# Altium PCB lab2_kozlov_buck_boost.PcbDoc
Units mm, origin at the board's own origin, x right, y up, seen from the top; angles counter-clockwise.
Board outline 39 x 26.02 mm, 2 copper layers (Top Layer, Bottom Layer), stack 1.536 mm thick; 17 components, 14 nets, 60 pads, 130 vias.
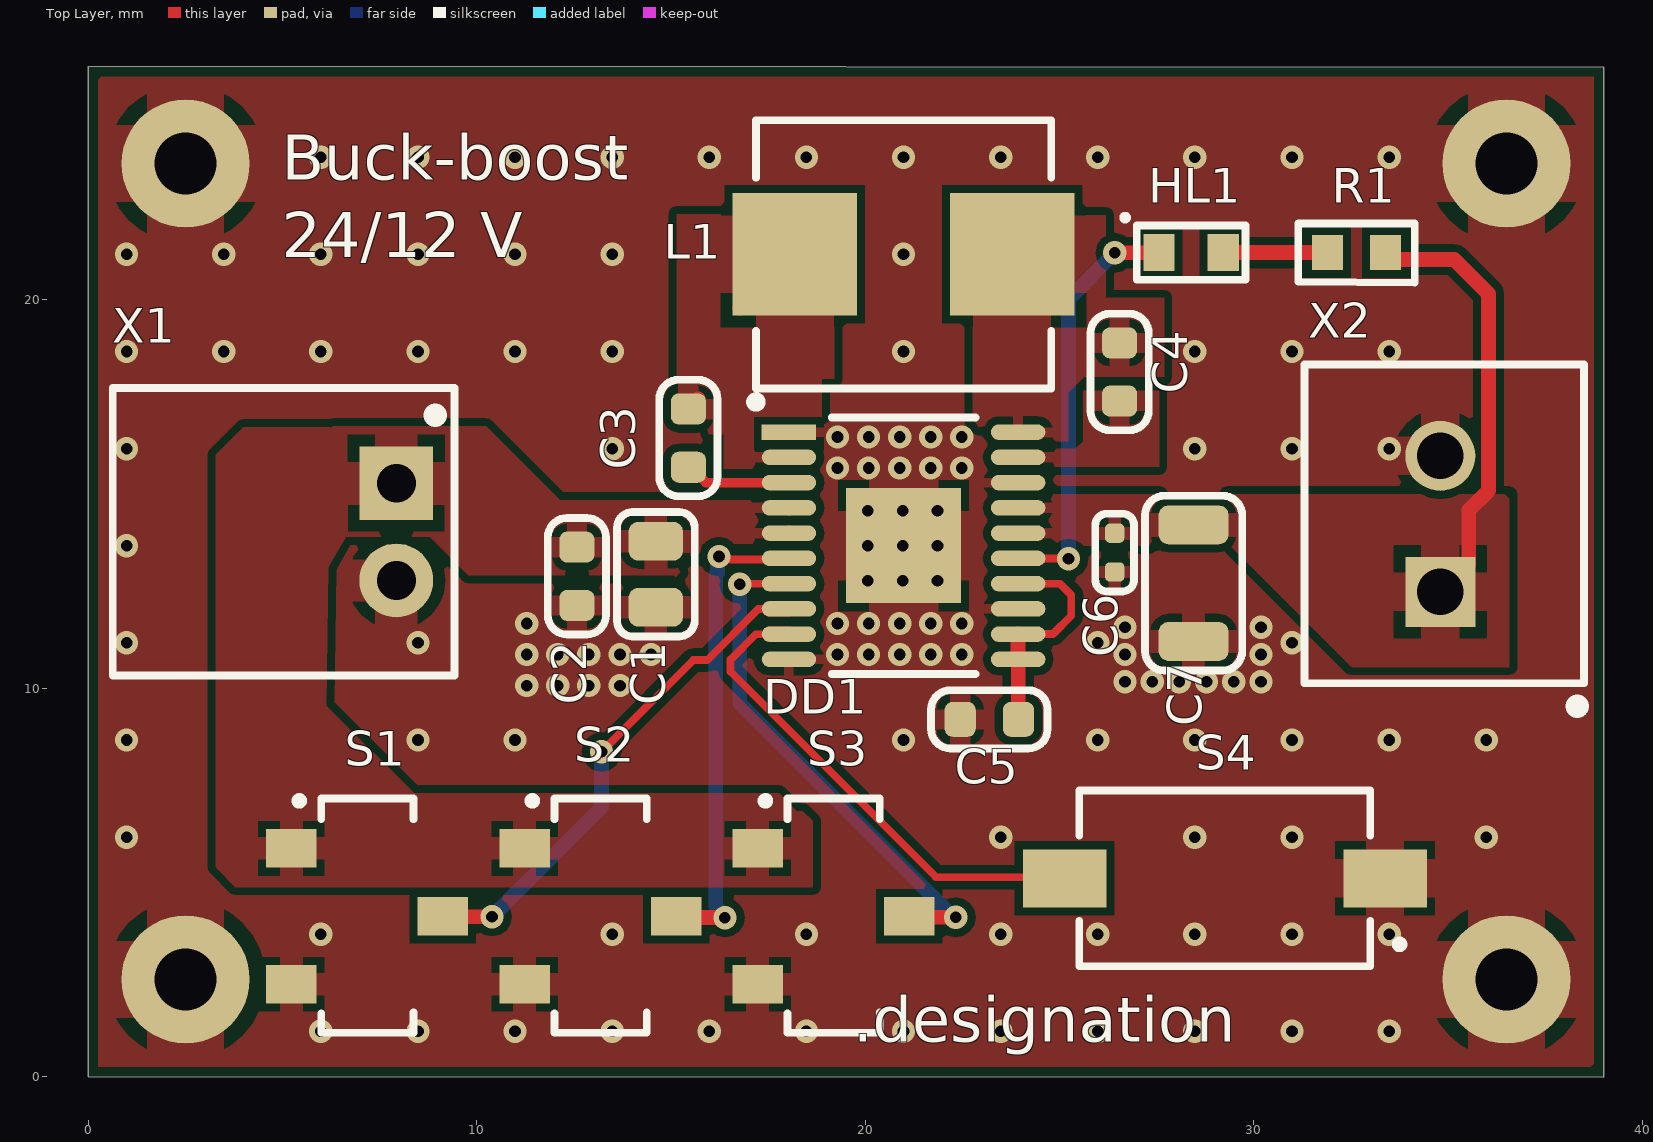
[diagram p0: Top Layer view]
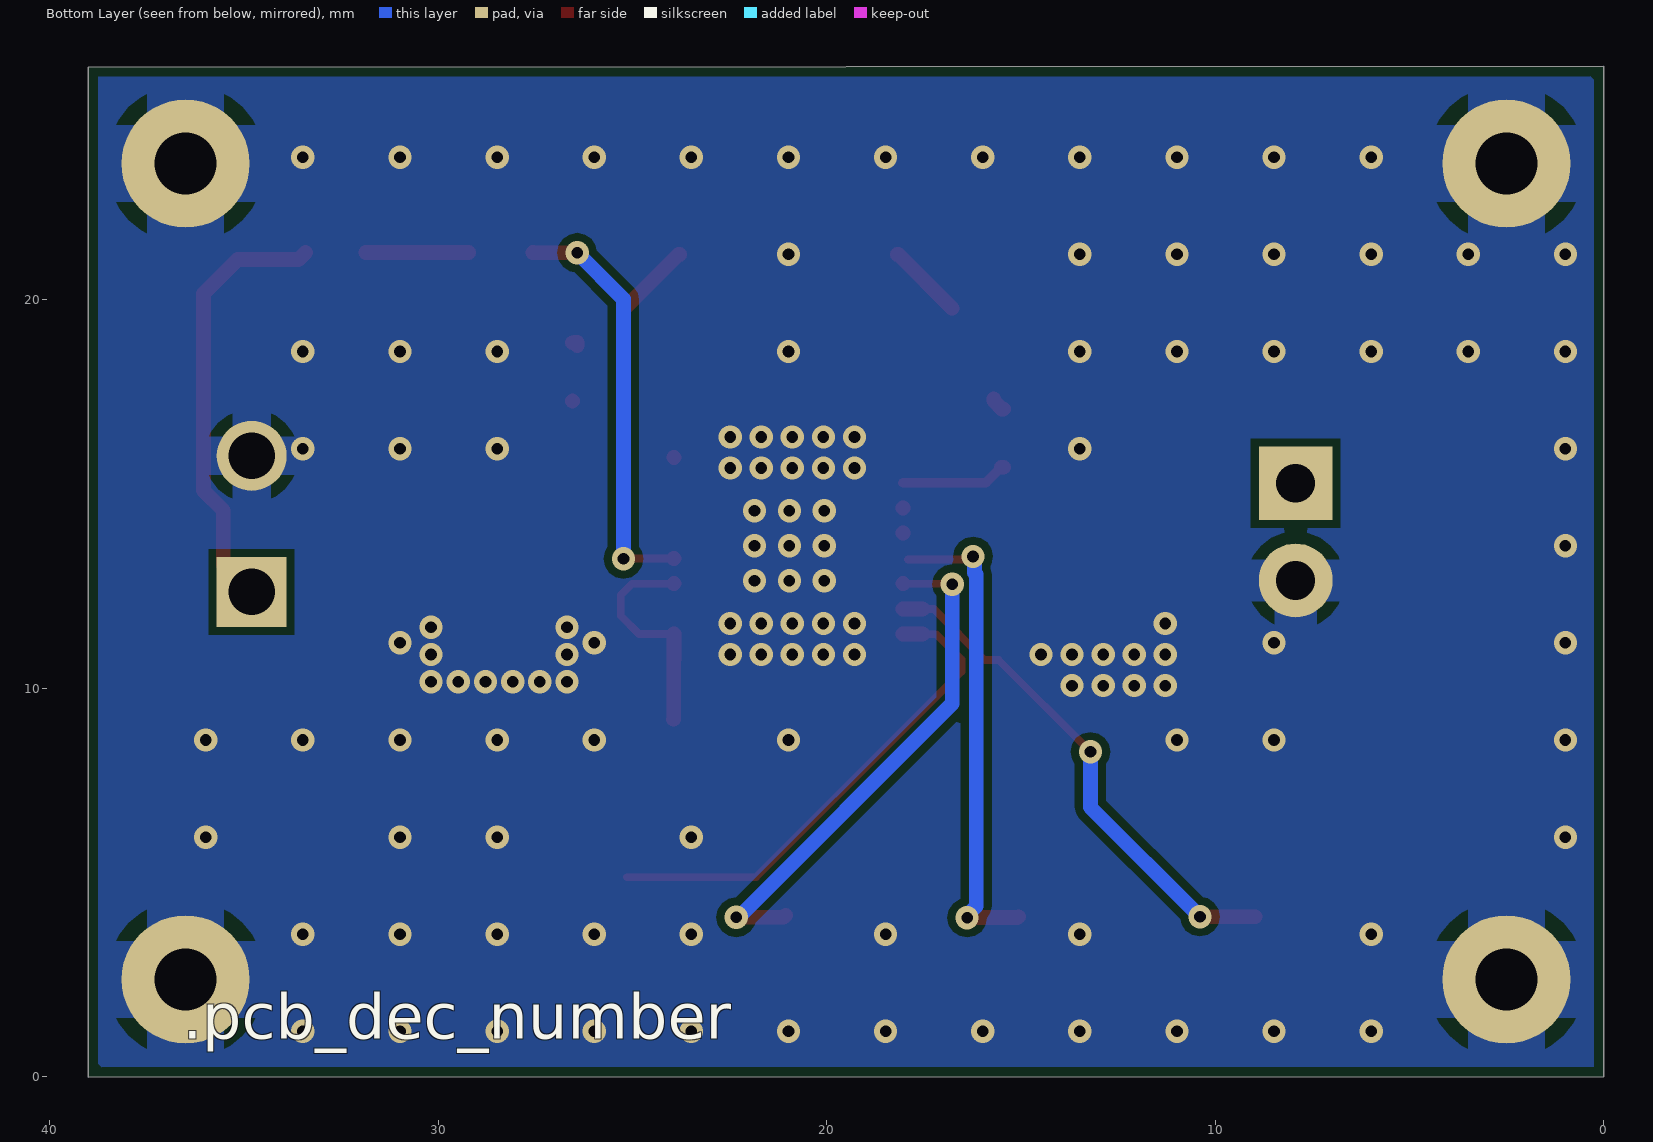
[diagram p1: Bottom Layer view, seen from below]
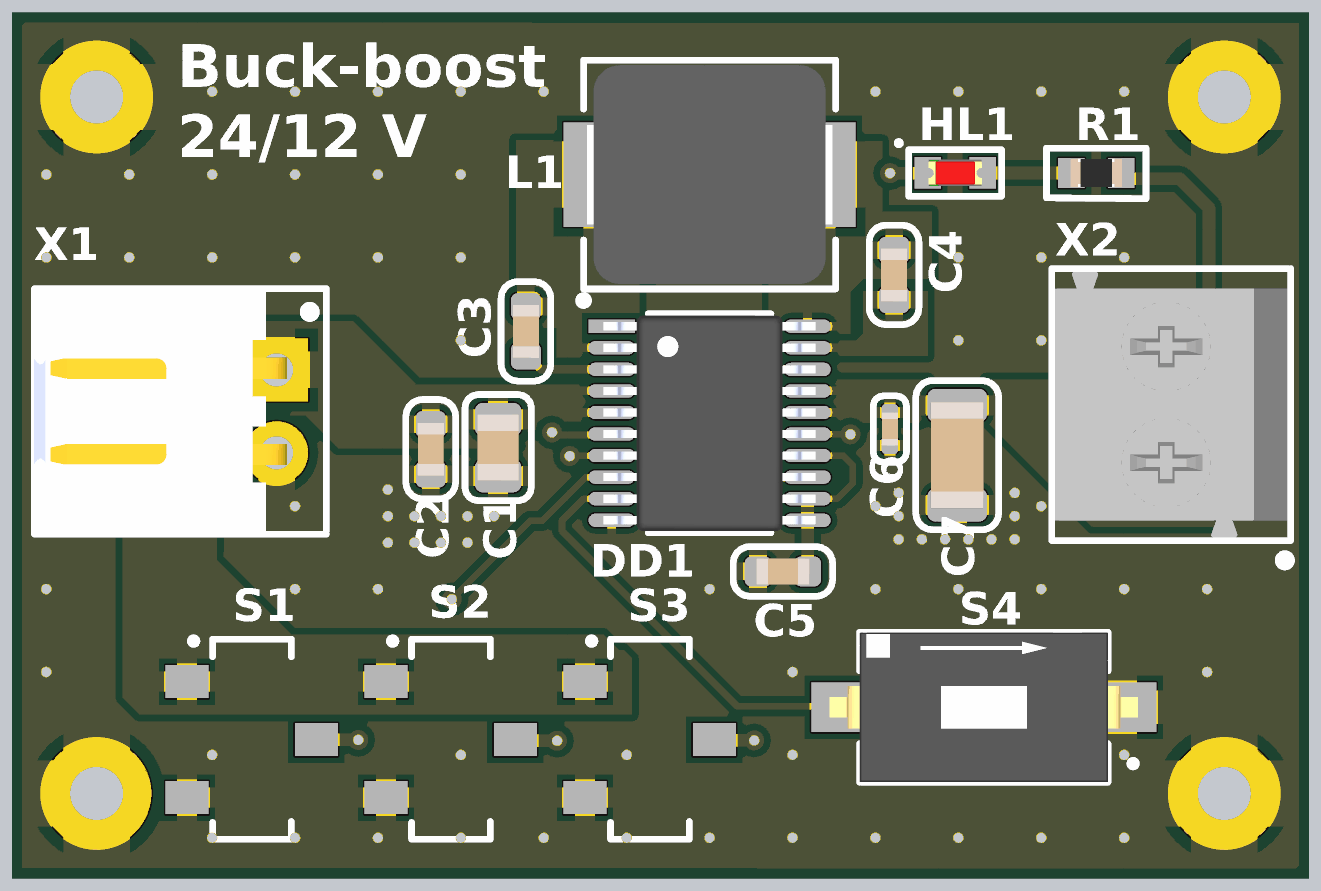
[diagram p2: 3D render of the assembled board from above, using the file's embedded part models]

## Layer stack, top to bottom
Top Solder: solder mask 0.0102, Solder Resist, Dk 3.5
Top Layer: signal copper 0.018
Core 1: core 1.5, FR4, Dk 4.6
Bottom Layer: signal copper 0.018
Bottom Solder: solder mask 0.0102, Solder Resist, Dk 3.5

## Board outline
0,0 39,-0.016 39,25.984 0,26

## Design rules (kind name [scope] priority, off if disabled: settings)
AcuteAngle min_acute_angle [OnCopper] p1: minimum=3.50000000000000E+0001 checktracksonly=FALSE // Минимальный угол между примитивами топологии
BoardOutlineClearance board_outline_clearance_std [NOT (OnLayer('Bottom Overlay') OR OnLayer('Top Overlay'))] p1: gap=0.25 ignorepadtopadclearanceinfootprint=FALSE except(0: Arc-SplitContinuation Track-SplitContinuation SMDPad-SplitContinuation THPad-SplitContinuation Via-SplitContinuation Fill-SplitContinuation Poly-SplitContinuation Region-SplitContinuation Text-SplitContinuation) // Отступ элементов топологии от края фрезеруемой печатной платы
Clearance clearance_outer_18um_std [OnTopLayer OR OnBottomLayer] p1: gap=0.125 ignorepadtopadclearanceinfootprint=TRUE except(0.2: Arc-Fill Arc-Poly Track-Fill Track-Poly SMDPad-SMDPad SMDPad-Fill SMDPad-Poly THPad-Fill THPad-Poly Via-Fill Via-Poly Fill-Fill Fill-Poly Poly-Poly Poly-Region Poly-Text; 0.25: Arc-Hole Track-Hole SMDPad-Hole THPad-Hole Via-Hole Fill-Hole Poly-Hole Region-Hole Text-Hole) // Зазоры на внешних слоях
Clearance clearance_inner_18um_std [NOT (OnTopLayer Or OnBottomLayer)] p2: gap=0.125 ignorepadtopadclearanceinfootprint=FALSE except(0.2: Arc-Fill Arc-Poly Track-Fill Track-Poly SMDPad-SMDPad SMDPad-Fill SMDPad-Poly THPad-Fill THPad-Poly Via-Fill Via-Poly Fill-Fill Fill-Poly Poly-Poly Poly-Region Poly-Text; 0.25: Arc-Hole Track-Hole SMDPad-Hole THPad-Hole Via-Hole Fill-Hole Poly-Hole Region-Hole Text-Hole) // Зазоры на внутренних слоях
ComponentClearance [All] p1: gap=0 collisioncheckmode=3 verticalgap=0 showdistances=FALSE
DiffPairsRouting diff_pairs_routing [All] p1: maxlimit=0.127 minlimit=0.127 mostfreqgap=0.127 toplayer_minwidth=0.143 toplayer_maxwidth=0.143 toplayer_prefwidth=0.143 bottomlayer_minwidth=0.143 bottomlayer_maxwidth=0.143 bottomlayer_prefwidth=0.143 impedanceprofiledriven=TRUE impedanceprofileid={FD46899E-B5A2-4EF5-A302-5D2DB6A51F35} maxuncoupledlength=12.7 // Правила трассировки дифференциальных пар
HoleSize min_hole_size_std [IsPad] p1: absolutevalues=TRUE maxlimit=5.9 minlimit=0.6 maxpercent=80.000 minpercent=20.000 // Диаметр межслойного переходного отверстия
HoleSize min_hole_size_via_std [IsVia] p2: absolutevalues=TRUE maxlimit=5.9 minlimit=0.3 maxpercent=80.000 minpercent=20.000 // Минимальный диаметр монтажного отверстия
HoleToHoleClearance hole_to_hole_clearance_std [All] p1: gap=0.2 allowstackedmicrovias=FALSE // Минимальное расстояние между краями двух отверстий
MinimumAnnularRing min_via_ar_std [All] p1: minimumring=0.15 // Поясок площадки переходного отверстия (Annular ring VIA)
MinimumAnnularRing min_pad_ar_std [All] p2: minimumring=0.2 // Поясок монтажной контактной площадки (Annular ring PAD)
MinimumSolderMaskSliver min_solder_mask_bridge_std [All] p1: minsoldermaskwidth=0.15 // Мнимальная ширина масочного мостика
PlaneClearance plane_clearance_18um_std [All] p1: clearance=0.2 // Отступ полигона (для слоя plane) от элементов топологии
PlaneConnect [All] p1: planeconnectstyle=Relief reliefexpansion=0.5 reliefentries=4 reliefconductorwidth=0.2 reliefairgap=0.2
PolygonConnect poly_connect_to_pad<=0.3 [(AsMM(PadXSize_AllLayers)<=0.301) or (AsMM(PadYSize_AllLayers)<=0.301)] p1: thpad.connectstyle=Relief thpad.reliefconductorwidth=0.2 thpad.reliefentries=4 thpad.polygonreliefangle="90 Angle" thpad.airgapwidth=0.2 smdpad.connectstyle=Relief smdpad.reliefconductorwidth=0.2 smdpad.reliefentries=4 smdpad.polygonreliefangle="90 Angle" smdpad.airgapwidth=0.2 via.connectstyle=Direct via.reliefconductorwidth=0.254 via.reliefentries=4 via.polygonreliefangle="90 Angle" via.airgapwidth=0.254 // Правила подключения полигонов для падов от 0,3мм и меньше
PolygonConnect poly_connect_to_pad<=0.4 [(AsMM(PadXSize_AllLayers)<=0.401) or (AsMM(PadYSize_AllLayers)<=0.401)] p2: thpad.connectstyle=Relief thpad.reliefconductorwidth=0.26 thpad.reliefentries=4 thpad.polygonreliefangle="90 Angle" thpad.airgapwidth=0.2 smdpad.connectstyle=Relief smdpad.reliefconductorwidth=0.26 smdpad.reliefentries=4 smdpad.polygonreliefangle="90 Angle" smdpad.airgapwidth=0.2 via.connectstyle=Direct via.reliefconductorwidth=0.254 via.reliefentries=4 via.polygonreliefangle="90 Angle" via.airgapwidth=0.254 // Правила подключения полигонов для падов от 0,4 и меньше
PolygonConnect poly_connect_to_pad<=0.6 [(AsMM(PadXSize_AllLayers)<=0.601) or (AsMM(PadYSize_AllLayers)<=0.601)] p3: thpad.connectstyle=Relief thpad.reliefconductorwidth=0.33 thpad.reliefentries=4 thpad.polygonreliefangle="90 Angle" thpad.airgapwidth=0.2 smdpad.connectstyle=Relief smdpad.reliefconductorwidth=0.33 smdpad.reliefentries=4 smdpad.polygonreliefangle="90 Angle" smdpad.airgapwidth=0.2 via.connectstyle=Direct via.reliefconductorwidth=0.254 via.reliefentries=4 via.polygonreliefangle="90 Angle" via.airgapwidth=0.254 // Правила подключения полигонов для падов от 0,6мм и меньше
PolygonConnect poly_connect_to_pad<=0.7 [(AsMM(PadXSize_AllLayers)<=0.701) or (AsMM(PadYSize_AllLayers)<=0.701)] p4: thpad.connectstyle=Relief thpad.reliefconductorwidth=0.46 thpad.reliefentries=4 thpad.polygonreliefangle="90 Angle" thpad.airgapwidth=0.2 smdpad.connectstyle=Relief smdpad.reliefconductorwidth=0.46 smdpad.reliefentries=4 smdpad.polygonreliefangle="90 Angle" smdpad.airgapwidth=0.2 via.connectstyle=Direct via.reliefconductorwidth=0.254 via.reliefentries=4 via.polygonreliefangle="90 Angle" via.airgapwidth=0.254 // Правила подключения полигонов для падов от 0,7мм и меньше
PolygonConnect poly_connect_to_pad<=0.8 [(AsMM(PadXSize_AllLayers)<=0.8)or(AsMM(PadYSize_AllLayers)<=0.8)] p5: thpad.connectstyle=Relief thpad.reliefconductorwidth=0.53 thpad.reliefentries=4 thpad.polygonreliefangle="90 Angle" thpad.airgapwidth=0.3 smdpad.connectstyle=Relief smdpad.reliefconductorwidth=0.53 smdpad.reliefentries=4 smdpad.polygonreliefangle="90 Angle" smdpad.airgapwidth=0.2 via.connectstyle=Direct via.reliefconductorwidth=0.254 via.reliefentries=4 via.polygonreliefangle="90 Angle" via.airgapwidth=0.254 // Правила подключения полигонов для падов от 0,8мм и меньше
PolygonConnect poly_connect_to_pad<=1 [(AsMM(PadXSize_AllLayers)<=1.01)or(AsMM(PadYSize_AllLayers)<=1.01)] p6: thpad.connectstyle=Relief thpad.reliefconductorwidth=0.6 thpad.reliefentries=4 thpad.polygonreliefangle="90 Angle" thpad.airgapwidth=0.3 smdpad.connectstyle=Relief smdpad.reliefconductorwidth=0.6 smdpad.reliefentries=4 smdpad.polygonreliefangle="90 Angle" smdpad.airgapwidth=0.2 via.connectstyle=Direct via.reliefconductorwidth=0.254 via.reliefentries=4 via.polygonreliefangle="90 Angle" via.airgapwidth=0.254 // Правила подключения полигонов для падов от 1мм и меньше
PolygonConnect poly_connect_to_pad<=1.3 [(AsMM(PadXSize_AllLayers)<=1.31)or(AsMM(PadYSize_AllLayers)<=1.31)] p7: thpad.connectstyle=Relief thpad.reliefconductorwidth=0.66 thpad.reliefentries=4 thpad.polygonreliefangle="90 Angle" thpad.airgapwidth=0.3 smdpad.connectstyle=Relief smdpad.reliefconductorwidth=0.86 smdpad.reliefentries=4 smdpad.polygonreliefangle="90 Angle" smdpad.airgapwidth=0.2 via.connectstyle=Direct via.reliefconductorwidth=0.254 via.reliefentries=4 via.polygonreliefangle="90 Angle" via.airgapwidth=0.254 // Правила подключения полигонов для падов от 1,3мм и меньше
PolygonConnect poly_connect_to_pad<=1.6 [(AsMM(PadXSize_AllLayers)<=1.61)or(AsMM(PadYSize_AllLayers)<=1.61)] p8: thpad.connectstyle=Relief thpad.reliefconductorwidth=0.8 thpad.reliefentries=4 thpad.polygonreliefangle="90 Angle" thpad.airgapwidth=0.3 smdpad.connectstyle=Relief smdpad.reliefconductorwidth=1 smdpad.reliefentries=4 smdpad.polygonreliefangle="90 Angle" smdpad.airgapwidth=0.2 via.connectstyle=Direct via.reliefconductorwidth=0.254 via.reliefentries=4 via.polygonreliefangle="90 Angle" via.airgapwidth=0.254 // Правила подключения полигонов для падов от 1,6мм и меньше
PolygonConnect poly_connect_to_pad<=1.8 [(AsMM(PadXSize_AllLayers)<=1.8)or(AsMM(PadYSize_AllLayers)<=1.8)] p9: thpad.connectstyle=Relief thpad.reliefconductorwidth=1 thpad.reliefentries=4 thpad.polygonreliefangle="90 Angle" thpad.airgapwidth=0.3 smdpad.connectstyle=Relief smdpad.reliefconductorwidth=1.2 smdpad.reliefentries=4 smdpad.polygonreliefangle="90 Angle" smdpad.airgapwidth=0.2 via.connectstyle=Direct via.reliefconductorwidth=0.254 via.reliefentries=4 via.polygonreliefangle="90 Angle" via.airgapwidth=0.254 // Правила подключения полигонов для падов от 1,8мм и меньше
PolygonConnect poly_connect_to_pad<=2 [(AsMM(PadXSize_AllLayers)<=2.01)or(AsMM(PadYSize_AllLayers)<=2.01)] p10: thpad.connectstyle=Relief thpad.reliefconductorwidth=1.1 thpad.reliefentries=4 thpad.polygonreliefangle="90 Angle" thpad.airgapwidth=0.3 smdpad.connectstyle=Relief smdpad.reliefconductorwidth=1.4 smdpad.reliefentries=4 smdpad.polygonreliefangle="90 Angle" smdpad.airgapwidth=0.2 via.connectstyle=Direct via.reliefconductorwidth=0.254 via.reliefentries=4 via.polygonreliefangle="90 Angle" via.airgapwidth=0.254 // Правила подключения полигонов для падов от 2мм и меньше
PolygonConnect poly_connect_to_pad<=2.3 [(AsMM(PadXSize_AllLayers)<=2.31)or(AsMM(PadYSize_AllLayers)<=2.31)] p11: thpad.connectstyle=Relief thpad.reliefconductorwidth=1.2 thpad.reliefentries=4 thpad.polygonreliefangle="90 Angle" thpad.airgapwidth=0.3 smdpad.connectstyle=Relief smdpad.reliefconductorwidth=1.4 smdpad.reliefentries=4 smdpad.polygonreliefangle="90 Angle" smdpad.airgapwidth=0.2 via.connectstyle=Direct via.reliefconductorwidth=0.254 via.reliefentries=4 via.polygonreliefangle="90 Angle" via.airgapwidth=0.254 // Правила подключения полигонов для падов от 2,3мм и меньше
PolygonConnect poly_connect_to_pad<=2.5 [(AsMM(PadXSize_AllLayers)<=2.51)or(AsMM(PadYSize_AllLayers)<=2.51)] p12: thpad.connectstyle=Relief thpad.reliefconductorwidth=1.2 thpad.reliefentries=4 thpad.polygonreliefangle="90 Angle" thpad.airgapwidth=0.3 smdpad.connectstyle=Relief smdpad.reliefconductorwidth=1.4 smdpad.reliefentries=4 smdpad.polygonreliefangle="90 Angle" smdpad.airgapwidth=0.2 via.connectstyle=Direct via.reliefconductorwidth=0.254 via.reliefentries=4 via.polygonreliefangle="90 Angle" via.airgapwidth=0.254 // Правила подключения полигонов для падов от 2,5мм и меньше
PolygonConnect poly_connect_to_pad<=2.7 [(AsMM(PadXSize_AllLayers)<=2.71)or(AsMM(PadYSize_AllLayers)<=2.71)] p13: thpad.connectstyle=Relief thpad.reliefconductorwidth=1.4 thpad.reliefentries=4 thpad.polygonreliefangle="90 Angle" thpad.airgapwidth=0.3 smdpad.connectstyle=Relief smdpad.reliefconductorwidth=1.6 smdpad.reliefentries=4 smdpad.polygonreliefangle="90 Angle" smdpad.airgapwidth=0.2 via.connectstyle=Direct via.reliefconductorwidth=0.254 via.reliefentries=4 via.polygonreliefangle="90 Angle" via.airgapwidth=0.254 // Правила подключения полигонов для падов от 2,7мм и меньше
PolygonConnect poly_connect_to_pad<=3 [(AsMM(PadXSize_AllLayers)<=3.01)or(AsMM(PadYSize_AllLayers)<=3.01)] p14: thpad.connectstyle=Relief thpad.reliefconductorwidth=1.6 thpad.reliefentries=4 thpad.polygonreliefangle="90 Angle" thpad.airgapwidth=0.3 smdpad.connectstyle=Relief smdpad.reliefconductorwidth=1.8 smdpad.reliefentries=4 smdpad.polygonreliefangle="90 Angle" smdpad.airgapwidth=0.2 via.connectstyle=Direct via.reliefconductorwidth=0.254 via.reliefentries=4 via.polygonreliefangle="90 Angle" via.airgapwidth=0.254 // Правила подключения полигонов для падов от 3мм и меньше
PolygonConnect poly_connect_to_pad<=7 [(AsMM(PadXSize_AllLayers)<7.01)or(AsMM(PadYSize_AllLayers)<=7.01)] p15: thpad.connectstyle=Relief thpad.reliefconductorwidth=2 thpad.reliefentries=4 thpad.polygonreliefangle="90 Angle" thpad.airgapwidth=0.4 smdpad.connectstyle=Relief smdpad.reliefconductorwidth=2 smdpad.reliefentries=4 smdpad.polygonreliefangle="90 Angle" smdpad.airgapwidth=0.3 via.connectstyle=Direct via.reliefconductorwidth=0.254 via.reliefentries=4 via.polygonreliefangle="90 Angle" via.airgapwidth=0.254 // Правила подключения полигонов для падов от 7мм и меньше
PolygonConnect poly_connect_to_pad [All] p16: thpad.connectstyle=Relief thpad.reliefconductorwidth=0.25 thpad.reliefentries=4 thpad.polygonreliefangle="90 Angle" thpad.airgapwidth=0.2 smdpad.connectstyle=Relief smdpad.reliefconductorwidth=0.25 smdpad.reliefentries=4 smdpad.polygonreliefangle="90 Angle" smdpad.airgapwidth=0.2 via.connectstyle=Direct via.reliefconductorwidth=0.25 via.reliefentries=4 via.polygonreliefangle="90 Angle" via.airgapwidth=0.2 // Правила подключения полигонов общие
RoutingCorners [All] p1 off: cornerstyle=45-Degree minsetback=2.5 maxsetback=2.5
RoutingVias [All] p1: holewidth=0.3 width=0.6 viastyle="Through Hole" minholewidth=0.3 minwidth=0.6 maxholewidth=5.9 maxwidth=6.4
SilkToSilkClearance silk_to_silk_clearance_std [All] p1 off: silktosilkclearance=0.15 // Отступ текста шелкографии от других примитивов шелкографии
SilkToSolderMaskClearance silk_to_solder_mask_clearance_std [IsPad] p1 off: minsilkscreentomaskgap=0.15 clearancetoexposedcopper=FALSE // Минимальное расстояние между элементами шелкографии и вскрытой медью
SolderMaskExpansion solder_mask_expansion_std [All] p1: expansion=0.05 // Припуск паяльной масски
UnRoutedNet [All] p1: checkbadconnections=TRUE
Width width_18um_std [All] p1: maxlimit=10 minlimit=0.125 preferedwidth=0.15 checkconnectedcopper=TRUE // Ширина проводников (общая)
19 further rules are at their usual default settings.

## Components (designator, comment, footprint, x,y, rotation, side; value= is the part's Value field where it differs from the comment)
C1 "10 мк" C0805 14.605,12.929 r270 top
C2 "0,47 мк" C0603 12.573,12.878 r270 top
C3 "0,1 мк" C0603 15.443,16.434 r270 top
C4 "0,1 мк" C0603 26.543,18.136 r270 top
C5 "4,7 мк" C0603 23.19,9.195 r180 top
C6 "0,1 мк" C0402 26.416,13.487 r270 top
C7 "22 мк" C1206 28.448,12.7 r270 top
DD1 "TPS55165QPWPRQ1" HTSSOP-20 20.981,13.663 r0 top
HL1 "TLMG1100-GS08" HL0603 28.385,21.209 r0 top
L1 "SRP7028A-4R7M" SRP-2-730X660X280 20.981,21.163 r0 top
R1 "100 к" R0603 32.639,21.209 r0 top
S1 "TDD01H0SB1R" TDD01H0SB1R 7.2,4.1 r0 top
S2 "TDD01H0SB1R" TDD01H0SB1R 13.2,4.1 r0 top
S3 "TDD01H0SB1R" TDD01H0SB1R 19.2,4.1 r0 top
S4 "SDA01H1SBD" SDA01H1SBD 29.25,5.1 r180 top
X1 "DS1029-2-MRW6XB" DS1029-2-MRW6XB 4.775,14.021 r270 top
X2 "1776275-2" 1776275-2 34.9,14.225 r90 top

## Footprints (in the part's own frame and the unit in brackets; to place one, negate y for a bottom-side part, rotate by r counter-clockwise, add the part's x,y. Pads: shape width x height; smd on the part's side, far side on the other; paste and mask are expansions set on the pad)
1776275-2 [mm] "PCB Terminal Blocks, Header, Wire-to-Board, 2 Position, 3.5mm [.138in] Centerline, 1 Row, Side Wire Entry Angle, 26 – 18AWG Wire Size"
  rect 1.8x1.8 hole 1.2: 1(-1.75,0.1)
  round 1.8 hole 1.2: 2(1.75,0.1)
  silkscreen extent -4.7,-3.6 4.1,3.6, body extent -4,-3.5 4,3.5, height 8.3
C0402 [mm] "Chip Capacitor, 2-Leads, Body 1,00x0,50mm, IPC Medium Density"
  rrect50% 0.5x0.5 smd: 1(-0.5,0) 2(0.5,0)
  silkscreen extent -1,-0.5 1,0.5, body extent -0.5,-0.25 0.5,0.25, height 0.5
C0603 [mm] "Chip Capacitor, 2-Leads, Body 1,60x0,80mm, IPC Medium Density"
  rrect50% 0.8x0.9 smd: 1(-0.75,0) 2(0.75,0)
  silkscreen extent -1.5,-0.75 1.5,0.75, body extent -0.8,-0.4 0.8,0.4, height 0.8
C0805 [mm] "Chip Capasitor, 2-Leads, Body 2,00x1,25mm, IPC Medium Density"
  rrect50% 1x1.4 smd: 1(-0.85,0) 2(0.85,0)
  silkscreen extent -1.6,-1 1.6,1, body extent -1,-0.62 1,0.63, height 0.6
C1206 [mm] "Chip Capacitor, 2-Leads, Body 3,20x1,60mm, IPC Medium Density"
  rrect50% 1x1.8 smd: 1(-1.5,0) 2(1.5,0)
  silkscreen extent -2.25,-1.25 2.25,1.25, body extent -1.6,-0.8 1.6,0.8, height 0.78
DS1029-2-MRW6XB [mm]
  rect 1.9x1.9 hole 1: 1(-1.25,3.15)
  round 1.9 hole 1: 2(1.25,3.15)
  silkscreen extent -3.7,-4.15 3.7,4.65, body extent -3.7,-4.17 3.7,3.47, height 5.75
HL0603 [mm] "Chip Diode, 2-Leads, Body 1,60x0,80mm, IPC Medium Density"
  rect 0.8x0.95 smd: 1(-0.825,0) 2(0.825,0)
  silkscreen extent -1.75,-0.7 1.4,0.95, body extent -0.81,-0.4 0.81,0.4, height 0.6
HTSSOP-20 [mm] "TSOP, 20-Leads, Body 6,50x4,40mm, Pitch 0,65mm, Thermal Pad 2,96x2,96mm, IPC Medium Density"
  rect 2.96x2.96 smd: 0(0,0)
  rect 1.4x0.4 smd: 1(-2.95,2.925)
  oval 1.4x0.4 smd: 2(-2.95,2.275) 3(-2.95,1.625) 4(-2.95,0.975) 5(-2.95,0.325) 6(-2.95,-0.325) 7(-2.95,-0.975) 8(-2.95,-1.625) 9(-2.95,-2.275) 10(-2.95,-2.925) 11(2.95,-2.925) 12(2.95,-2.275) 13(2.95,-1.625) 14(2.95,-0.975) 15(2.95,-0.325) 16(2.95,0.325) 17(2.95,0.975) 18(2.95,1.625) 19(2.95,2.275) 20(2.95,2.925)
  silkscreen extent -3.92,-3.3 1.85,3.82, body extent -3.2,-3.25 3.2,3.25, height 1.1
R0603 [mm] "Chip Resistor, 2-Leads, Body 1,60x0,80mm, IPC Medium Density"
  rect 0.8x0.9 smd: 1(-0.75,0) 2(0.75,0)
  silkscreen extent -1.5,-0.77 1.5,0.75, body extent -0.77,-0.43 0.78,0.43, height 0.43
SDA01H1SBD [mm]
  rect 2.15x1.5 smd: 1(-4.125,0) 2(4.125,0)
  silkscreen extent -4.6,-2.26 3.74,2.26, body extent -4.65,-2.26 4.65,2.26, height 5.44
SRP-2-730X660X280 [mm] "Precision Wire Wound Inductor, 2-Leads, Body 7,30x6,60mm, IPC Medium Density"
  rect 3.2x3.15 smd: 1(-2.8,0) 2(2.8,0)
  silkscreen extent -3.8,-3.45 3.8,3.45, body extent -3.7,-3.3 3.7,3.3, height 3
TDD01H0SB1R [mm]
  rect 1.3x1 smd: 1(-1.975,1.774) 2(-1.975,-1.726) 3(1.925,0.024)
  silkscreen extent -1.87,-2.98 1.17,3.09, body extent -2.12,-2.98 2.08,3.02, height 2.29

## Part data
C1: library part c0091, "=Описание", HelpURL=https://www.yageo.com/upload/media/product/productsearch/datasheet/mlcc/UPY-GPHC_X5R_4V-to-50V_26.pdf, ID=c0091, Корпус=0805, Наименование=CC0805KRX5R9BB106, Напряжение="50 В", Номинал="10 мк", Номинальное напряжение="50 В", Описание="Конденсатор чип 0805 10 мкФ 50 В ±10 %", Отклонение="±10 %", Производитель="YAGEO Corp.", Рабочие температуры="от –55 °С до +85 °С", Температурный коэффициент емкости=X5R, Фамилия=Паньков
C2: library part c0052, "=Описание", HelpURL=https://www.yageo.com/upload/media/product/productsearch/datasheet/mlcc/UPY-GPHC_X5R_4V-to-50V_26.pdf, ID=c0052, Корпус=0603, Наименование=CC0603KRX5R9BB474, Напряжение="50 В", Номинал="0,47 мк", Номинальное напряжение="50 В", Описание="Конденсатор чип 0603 470 нФ 50 В ±10 %", Отклонение="±10 %", Производитель="YAGEO Corp.", Рабочие температуры="от –55 °С до +85 °С", Температурный коэффициент емкости=X5R, Фамилия=Паньков
C3 C4: library part c0034, "=Описание", HelpURL=https://www.yageo.com/upload/media/product/products/datasheet/mlcc/UPY-GPHC_X7R_6.3V-to-50V_20.pdf, ID=c0034, Корпус=0603, Наименование=CC0603JRX7R9BB104, Напряжение="50 В", Номинал="0,1 мк", Номинальное напряжение="50 В", Описание="Конденсатор чип 0603 100 нФ 50 В ±5 %", Отклонение="±5 %", Производитель="YAGEO Corp.", Рабочие температуры="от –55 °С до +125 °С", Температурный коэффициент емкости=X7R, Фамилия=Ларионов
C5: library part c0080, "=Описание", HelpURL=https://www.yageo.com/upload/media/product/productsearch/datasheet/mlcc/UPY-GPHC_X5R_4V-to-50V_26.pdf, ID=c0080, Корпус=0603, Наименование=CC0603KRX5R8BB475, Напряжение="25 В", Номинал="4,7 мк", Номинальное напряжение="25 В", Описание="Конденсатор чип 0603 4,7 мкФ 25 В ±10 %", Отклонение="±10 %", Производитель="YAGEO Corp.", Рабочие температуры="от –55 °С до +85 °С", Температурный коэффициент емкости=X5R, Фамилия=Ларионов
C6: library part c0029, "=Описание", HelpURL=https://www.yageo.com/upload/media/product/productsearch/datasheet/mlcc/UPY-GPHC_X5R_4V-to-50V_26.pdf, ID=c0029, Корпус=0402, Наименование=CC0402KRX5R8BB104, Напряжение="25 В", Номинал="0,1 мк", Номинальное напряжение="25 В", Описание="Конденсатор чип 0402 100 нФ 25 В ±10 %", Отклонение="±10 %", Производитель="YAGEO Corp.", Рабочие температуры="от –55 °С до +85 °С", Температурный коэффициент емкости=X5R, Фамилия=Паньков
C7: library part c0105, "=Описание", HelpURL=https://www.yageo.com/upload/media/product/productsearch/datasheet/mlcc/UPY-GPHC_X7R_6.3V-to-50V_20.pdf, ID=c0105, Корпус=1206, Наименование=CC1206KRX7R8BB226, Напряжение="25 В", Номинал="22 мк", Номинальное напряжение="25 В", Описание="Конденсатор чип 1206 22 мкФ 25 В ±10 %", Отклонение="±10 %", Производитель="YAGEO Corp.", Рабочие температуры="от –55 °С до +125 °С", Температурный коэффициент емкости=X7R, Фамилия=Паньков
DD1: library part dd0013, "=Описание", HelpURL=https://www.ti.com/product/TPS55165-Q1, ID=dd0013, Входное напряжение="от 2 В до 36 В", Выходное напряжение="5 В/12 В", Коммутируемый ток="до 1 А", Корпус=HTSSOP-20, Наименование=TPS55165QPWPRQ1, Описание="Повышающий/понижающий преобразователь напряжения 36 В и 1 А", Производитель="Texas Instruments", Рабочие температуры="от –40 °С до +125 °С", Фамилия=Козлов, Частота переключения="2 МГц"
HL1: library part hl0005, "=Описание", HelpURL=https://www.vishay.com/leds/list/product-83173/, ID=hl0005, Корпус=0603, Наименование=TLMG1100-GS08, Номинальная длина волны="570 нм", Номинальная сила света="35 мкд", Номинальное падение напряжения="2,1 В", Номинальный прямой ток="30 мА", Описание="Светодиод чип 0603 зеленый", Производитель="Vishay Intertechnology, Inc.", Рабочие температуры="от –40 °С до +100 °С", Рассеиваемая мощность="90 мВт", Фамилия=Ларионов, Цвет=Green
L1: library part l0004, "=Описание", HelpURL=https://www.bourns.com/products/magnetic-products/power-inductors-aec-q200-compliant/product/SRP7028A, ID=l0004, Индуктивность="4,7 мкГн", Корпус="7,3 x 6,6 x 2,8", Максимальное активное сопротивление="40 мОм", Наименование=SRP7028A-4R7M, Номинал="4,7 мкГн", Номинальное активное сопротивление="37 мОм", Номинальный ток (при нагреве на 20 °С/40 °С)="5,5 А", Описание="Катушка индуктивности 4,7 мкГн ±20 %", Отклонение="±20 %", Производитель="Bourns, Inc.", Рабочее напряжение="не указано", Рабочие температуры="от –55 °С до +150 °С", Резонансная частота="21 МГц", Ток насыщения="10 А", Фамилия=Игнатова
R1: library part r0094, "=Описание", HelpURL=https://www.yageo.com/upload/media/product/productsearch/datasheet/rchip/PYu-RC_Group_51_RoHS_L_11.pdf, ID=r0094, Корпус=0603, Наименование=RC0603FR-07100KL, Номинал="100 к", Номинальное напряжение="75 В", Номинальный ток="1 А", Описание="Резистор чип 0603 100 кОм ±1 % 0,1 Вт", Отклонение="±1 %", Производитель="YAGEO Corp.", Рабочие температуры="от –55 °С до +155 °С", Фамилия=Водорезов
S1 S2 S3: library part s0005, "=Описание", HelpURL=https://www.ckswitches.com/products/switches/product-details/DIP/TDD/TDD01H0SB1R/, ID=s0005, Количество контактов=3, Корпус=6,00х4,20х2,30, Наименование=TDD01H0SB1R, Описание="2-х позиционный движковый переключатель", Производитель=C&K, Промывка=Разрешена, Рабочие температуры="от –35 °С до +85 °С", Сопротивление контакта="100 мОм", Ток нагрузки="25 мА @ 24 В", Фамилия=Игнатова
S4: library part s0002, "=Описание", HelpURL=https://www.ckswitches.com/products/switches/product-details/DIP/SDA/SDA01H1SBD/, ID=s0002, Количество контактов=2, Корпус=4,52х9,30х5,45, Наименование=SDA01H1SBD, Описание="2-х позиционный движковый переключатель", Производитель=C&K, Промывка=Разрешена, Рабочие температуры="от –40 °С до +85 °С", Сопротивление контакта="50 мОм", Ток нагрузки="100 мА @ 5 В", Фамилия=Паньков
X1: library part x0007, "=Описание", Contact_1=VIN, Contact_2=GND, HelpURL=http://www.connfly.com/productshow.aspx?id=352, ID=x0007, Наименование=DS1029-2-MRW6XB, Описание="CWF 2 pin Type B 2,5 мм вилка угловой", Производитель="Connfly Electronic Co. LTD.", Фамилия=Ларионов
X2: library part x0005, "=Описание", Contact_1=VOUT, Contact_2=GND, HelpURL=https://www.te.com/usa-en/product-1776275-2.html, ID=x0005, Наименование=1776275-2, Описание="Terminal Block 2 pin 3,5 мм", Производитель="TE Connectivity", Фамилия=Паньков

## Free pads (board coordinates)
  round 3.3 hole 1.6: 1(2.5,2.5) 1(2.5,23.5) 1(36.5,2.5) 1(36.5,23.5)

## Via types
v1: diameter 0.6, hole 0.3, Top Layer to Bottom Layer, tented both sides, 121 vias
v2: diameter 0.6, hole 0.3, Top Layer to Bottom Layer, tented top, 9 vias

## Nets (pads, with @x,y where several pads share a name; then routed paths per layer and width w, separated by ;. In a path a pad name is that pad's centre, name@x,y a point inside that pad or via, vN(x,y) a via of type N, cw(c..) or ccw(c..) an arc to the next point about the centre after c; other vN are vias at no path point)
12V_OUT: C6.1 C7.1 DD1.16 DD1.17 R1.2 X2.1 | length 11.2
  Top Layer w0.381: R1.2@33.414,21.209 33.592,21.031 35.159,21.031 36.039,20.151 36.039,15.081 35.533,14.575 35.533,13.181 X2.1@34.823,12.471
24V_IN: C1.1 C2.1 DD1.4 DD1.5 S1.1 S2.1 S3.1 X1.1 | length 0
  Top Layer w0.381: DD1.5@18.028,13.991 DD1.5 ; DD1.4@18.028,14.641 DD1.4
GND: C1.2 C2.2 C5.2 C6.2 C7.2 DD1.0 DD1.1 DD1.10 DD1.13 DD1.18 pad.1 S1.2 S2.2 S3.2 S4.1 X1.2 X2.2
  other v1: 5.981,1.163 8.481,1.163 10.981,1.163 13.481,1.163 15.981,1.163 18.481,1.163 20.981,1.163 23.481,1.163 25.981,1.163 28.481,1.163 30.981,1.163 33.481,1.163 5.981,3.663 13.481,3.663 18.481,3.663 23.481,3.663 25.981,3.663 28.481,3.663 30.981,3.663 33.481,3.663 0.981,6.163 23.481,6.163 28.481,6.163 30.981,6.163 35.981,6.163 0.981,8.663 8.481,8.663 10.981,8.663 20.981,8.663 25.981,8.663 28.481,8.663 30.981,8.663 33.481,8.663 35.981,8.663 11.281,10.063 12.081,10.063 12.881,10.063 13.681,10.063 26.681,10.163 27.381,10.163 28.081,10.163 28.781,10.163 29.481,10.163 30.181,10.163 11.281,10.863 12.081,10.863 12.881,10.863 13.681,10.863 14.481,10.863 19.281,10.863 20.081,10.863 20.881,10.863 21.681,10.863 22.481,10.863 26.681,10.863 30.181,10.863 0.981,11.163 8.481,11.163 25.981,11.163 30.981,11.163 26.681,11.563 30.181,11.563 11.281,11.663 19.281,11.663 20.081,11.663 20.881,11.663 21.681,11.663 22.481,11.663 0.981,13.663 19.281,15.663 20.081,15.663 20.881,15.663 21.681,15.663 22.481,15.663 0.981,16.163 13.481,16.163 28.481,16.163 30.981,16.163 33.481,16.163 19.281,16.463 20.081,16.463 20.881,16.463 21.681,16.463 22.481,16.463 0.981,18.663 3.481,18.663 5.981,18.663 8.481,18.663 10.981,18.663 13.481,18.663 20.981,18.663 28.481,18.663 30.981,18.663 33.481,18.663 0.981,21.163 3.481,21.163 5.981,21.163 8.481,21.163 10.981,21.163 13.481,21.163 20.981,21.163 5.981,23.663 8.481,23.663 10.981,23.663 13.481,23.663 15.981,23.663 18.481,23.663 20.981,23.663 23.481,23.663 25.981,23.663 28.481,23.663 30.981,23.663 33.481,23.663
  other v2: 20.056,12.764 20.956,12.764 21.856,12.764 20.056,13.664 20.956,13.664 21.856,13.664 20.056,14.564 20.956,14.564 21.856,14.564
IGN: DD1.6 S2.3 | length 12.5
  Top Layer w0.2: v1@16.307,13.31 DD1.6@17.907,13.31
  Top Layer w0.381: S2.3@15.062,4.115 15.088,4.089 v1(16.383,4.089) ; v1(16.231,13.386) v1@16.307,13.31
  Bottom Layer w0.381: v1@16.148,13.386 v1(16.231,13.386) 16.189,13.344 16.189,12.97 16.148,12.93 16.148,4.383 16.383,4.149 v1(16.383,4.089)
IGN_PWRL: DD1.8 S1.3 | length 13.7
  Top Layer w0.2: v1(13.208,8.357) 15.57,10.719 15.926,10.719 17.241,12.034 DD1.8@18.028,12.034
  Top Layer w0.381: S1.3@8.966,4.115 v1(10.389,4.115) ; v1(13.208,8.357) v1@13.267,8.357 ; DD1.8@17.526,12.038 DD1.8 DD1.8@18.028,12.034
  Bottom Layer w0.381: v1(10.389,4.115) 13.208,6.934 v1(13.208,8.357)
NetC3_1: C3.1 DD1.2 L1.1 | length 2.4
  Top Layer w0.381: C3.1 C3.1@15.488,17.184 ; C3.1@15.493,17.184 C3.1@15.488,17.184 ; C3.1@15.697,17.437 15.697,17.393 C3.1@15.488,17.184 ; L1.1@16.772,19.778 18.156,21.163 L1.1
NetC3_2: C3.2 DD1.3 | length 2.8
  Top Layer w0.25: C3.2@15.499,15.684 15.895,15.288 DD1.3
  Top Layer w0.381: C3.2 C3.2@15.499,15.684
NetC4_1: C4.1 DD1.20 L1.2 | length 2.2
  Top Layer w0.381: L1.2 23.806,21.163 L1.2@25.191,19.778 ; C4.1@26.416,18.809 26.416,18.898 26.428,18.886 C4.1@26.485,18.886 ; C4.1@26.485,18.893 C4.1@26.485,18.886 ; C4.1 C4.1@26.485,18.886
NetC4_2: C4.2 DD1.19 | length 0
  Top Layer w0.381: DD1.19 DD1.19@23.935,15.941
NetHL1_2: HL1.2 R1.1 | length 2.7
  Top Layer w0.381: HL1.2 R1.1@31.864,21.209
PG: DD1.15 HL1.1 | length 10.8
  Top Layer w0.2: DD1.15@23.935,13.334 v1@25.223,13.334
  Top Layer w0.381: DD1.15 DD1.15@23.935,13.334 ; v1@25.223,13.334 v1(25.229,13.329) ; v1(26.422,21.203) 26.424,21.206 27.557,21.206 HL1.1
  Bottom Layer w0.381: v1(25.229,13.329) 25.229,20.01 v1(26.422,21.203)
PS: DD1.7 S3.3 | length 13.5
  Top Layer w0.2: v1@16.774,12.684 DD1.7@18.028,12.684
  Top Layer w0.381: v1(16.764,12.675) v1@16.774,12.684 ; DD1.7@18.028,12.684 DD1.7 ; S3.3@21.049,4.151 21.1,4.1 v1(22.324,4.1)
  Bottom Layer w0.381: v1(16.764,12.675) 16.764,9.601 v1@22.301,4.064
SS_EN: DD1.9 S4.2 | length 12.9
  Top Layer w0.2: DD1.9@17.522,11.384 17.179,11.384 16.53,10.735 16.53,10.42 21.819,5.131 S4.2@25.136,5.131
  Top Layer w0.381: DD1.9@17.522,11.384 17.526,11.388 DD1.9
VOS_FB: C5.1 DD1.11 DD1.12 DD1.14 | length 5.8
  Top Layer w0.2: DD1.12@23.935,11.391 24.828,11.391 25.298,11.862 25.298,12.395 25.009,12.684 DD1.14@23.935,12.684
  Top Layer w0.381: DD1.14 DD1.14@23.935,12.684 ; DD1.12@23.935,11.391 DD1.12 DD1.11 23.936,10.733 23.936,9.199 C5.1

## Polygon pours and split planes (outlines as drawn)
GND on Top Layer "Top Layer-GND" (solid, pour order 66): -0.381,26.289 40.259,26.289 40.259,-1.27 40.132,-1.143 -0.508,-1.143
NetC3_1 on Top Layer "Top Layer-NetC3_1" (solid, pour order 58): 18.872,15.646 18.872,17.932 18.898,17.958 19.202,17.958 19.202,22.2 15.138,22.2 15.138,16.535 16.358,16.535 16.358,15.646
NetC4_1 on Top Layer "Top Layer-NetC4_1" (solid, pour order 56): 22.758,22.174 26.187,22.174 26.187,20.041 27.686,20.041 27.686,19.507 27.686,18.009 25.629,18.009 25.222,17.602 25.222,16.307 24.74,16.307 23.063,16.307 22.758,16.307
NetC4_2 on Top Layer "Top Layer-NetC4_2" (solid, pour order 42): 23.216,16.154 23.216,15.697 27.559,15.697 27.559,17.653 26.035,17.653 25.603,17.653 25.603,16.358 25.4,16.154
12V_OUT on Top Layer "Top Layer-12V_OUT" (solid, pour order 36): 23.063,14.935 23.114,14.986 36.576,14.986 36.576,10.541 32.512,10.541 29.388,13.665 23.063,13.665
24V_IN on Top Layer "Top Layer-24V_IN 2" (solid, pour order 20): 6.248,16.789 6.299,16.739 10.236,16.739 12.116,14.859 12.116,14.834 18.948,14.834 18.974,14.808 18.974,13.64 18.898,13.716 15.748,13.716 15.748,13.487 15.113,12.852 15.062,12.903 9.779,12.903 8.788,13.894 6.198,13.894
24V_IN on Top Layer "Top Layer-24V_IN" (solid, pour order 24): 6.22,16.713 3.988,16.713 3.277,16.002 3.277,14.834 3.277,5.385 3.785,4.877 18.644,4.877 18.644,6.579 18.39,6.833 18.237,6.833 17.78,7.29 8.382,7.29 6.125,9.547 6.172,13.106 6.693,14.008
no net on Top Layer "Top Layer-No Net 1" (solid, pour order 60): 0,26.01
no net on Top Layer "Top Layer-No Net 2" (solid, pour order 34): 23.063,14.935
24V_IN on Top Layer "Top Layer-24V_IN 1" (solid, pour order 22): 3.251,5.867
no net on Top Layer "Top Layer-No Net" (solid, pour order 12): 29.337,14.732
GND on Bottom Layer "Bottom Layer-GND" (solid, pour order 64): -0.889,26.67 41.148,26.67 41.148,-2.413 -1.016,-2.413
no net on Bottom Layer "Bottom Layer-No Net" (solid, pour order 16): -0.051,25.578

## Silkscreen, mask and mechanical layers (free items; w line width, h text height)
Top Overlay:
  text "Buck-boost / 24/12 V" at 4.978,20.701 h2
  text ".designation" at 19.685,0.508 h2
Bottom Overlay:
  text ".pcb_dec_number" at 36.576,0.584 h2
Board:
  the board outline again, w0.1
Assembly Notes (Mech5):
  text "'.title'" at -11.519,-8.837 h2
  text "'.project'_'.pcb_dec_number'['.Pcb_File_Name_No_Path']" at -11.519,-11.337 h2